# Altium PCB SoundActiveLight.PcbDoc
Units mm, origin at the board's own origin, x right, y up, seen from the top; angles counter-clockwise.
Board outline 60 x 25 mm, 2 copper layers (Top Layer, Bottom Layer); 21 components, 17 nets, 65 pads, 15 vias.
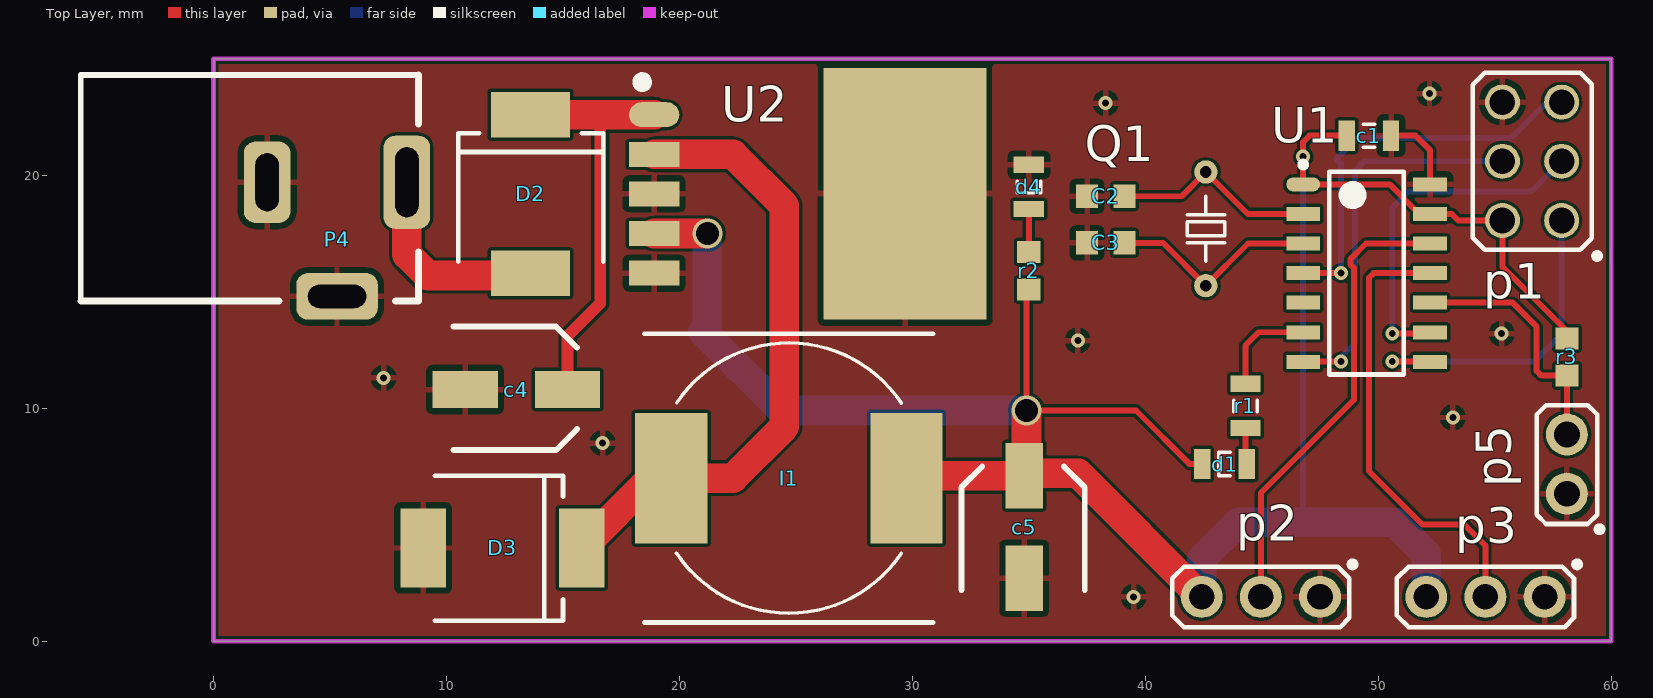
[diagram p0: Top Layer view]
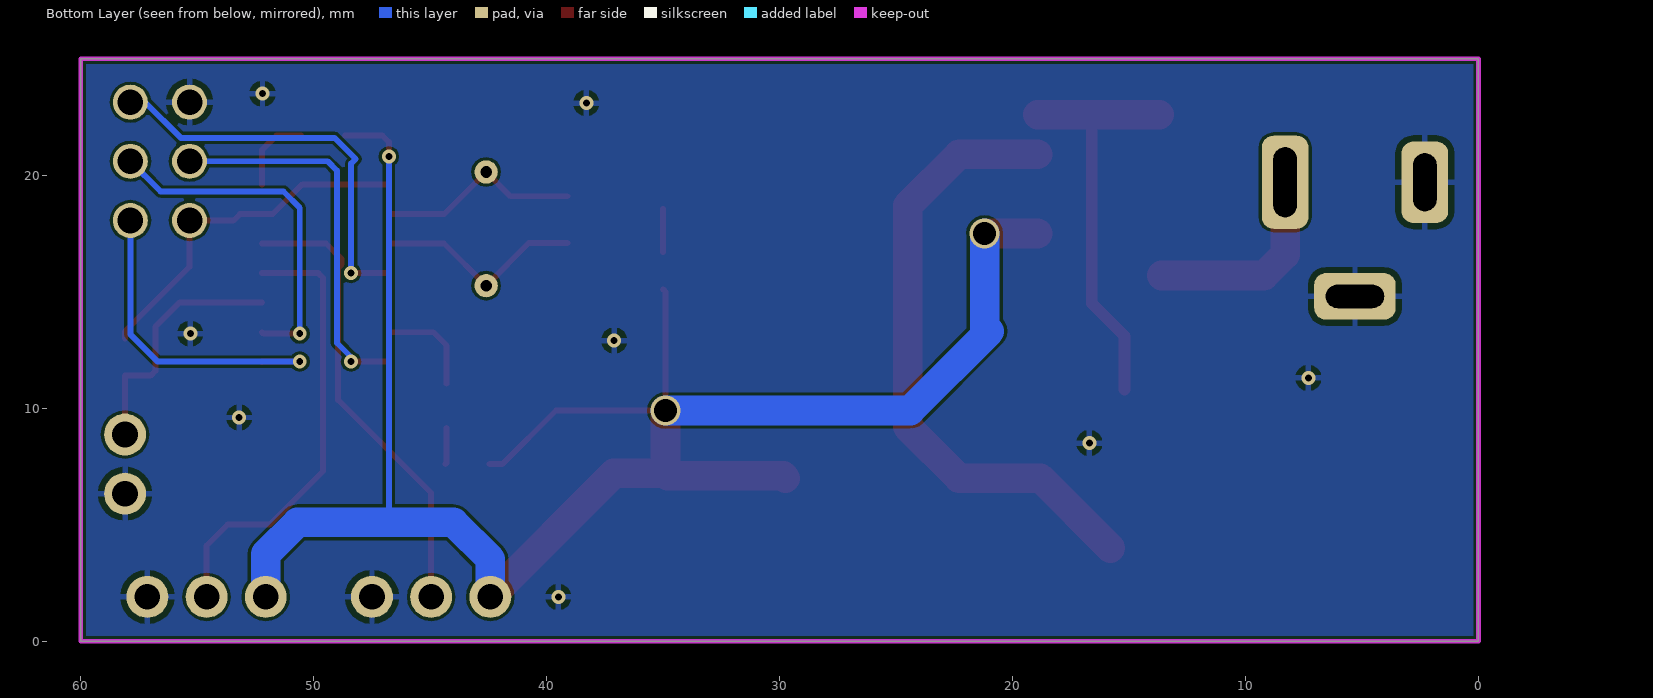
[diagram p1: Bottom Layer view, seen from below]
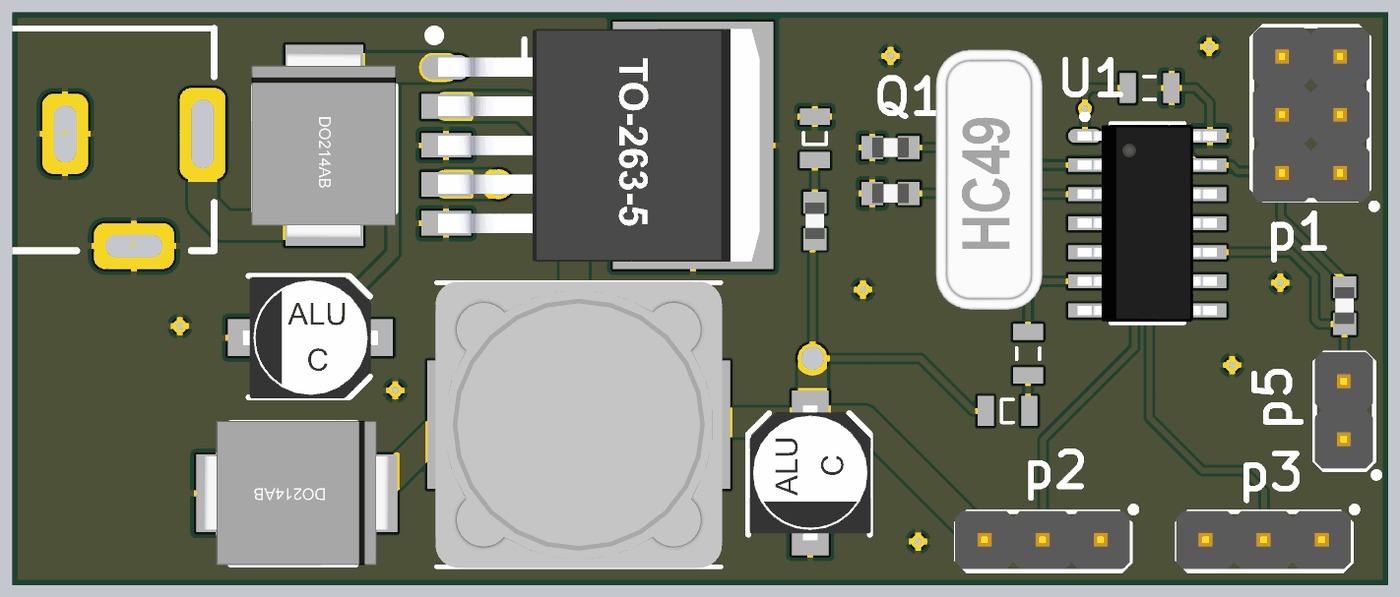
[diagram p2: 3D render of the assembled board from above, using the file's embedded part models]

## Layer stack, top to bottom
Top Solder: solder mask 0.0102, Solder Resist, Dk 3.5
Top Layer: signal copper 0.0356
Dielectric 1: dielectric 0.32, FR-4, Dk 4.8
Bottom Layer: signal copper 0.0356
Bottom Solder: solder mask 0.0102, Solder Resist, Dk 3.5

## Board outline
0,0 60,0 60,25 0,25

## Design rules (kind name [scope] priority, off if disabled: settings)
Clearance [All] p1: gap=0.127 ignorepadtopadclearanceinfootprint=FALSE
HoleSize [All] p1: absolutevalues=TRUE maxlimit=2 minlimit=0.3 maxpercent=80.000 minpercent=20.000
HoleToHoleClearance [All] p1: gap=0.305 allowstackedmicrovias=TRUE
MinimumAnnularRing [All] p1: minimumring=0.15
MinimumSolderMaskSliver [All] p1: minsoldermaskwidth=0.32
PolygonConnect [All] p1: connectstyle=Relief reliefconductorwidth=0.254 reliefentries=4 polygonreliefangle="90 Angle" airgapwidth=0.254
RoutingVias [All] p1: holewidth=0.5 width=0.8 viastyle="Through Hole" minholewidth=0.3 minwidth=0.6 maxholewidth=1 maxwidth=1.3
SolderMaskExpansion [All] p1: expansion=0.102
Width [All] p1: maxlimit=1.27 minlimit=0.127 preferedwidth=0.254
27 further rules are at their usual default settings.

## Classes and differential pairs
component class µController: c1 C2 C3 d1 p1 p2 p3 p5 Q1 r1 r3 U1
component class PowerSupply: c4 c5 D2 D3 d4 I1 P4 r2 U2

## Components (designator, comment, footprint, x,y, rotation, side; value= is the part's Value field where it differs from the comment)
c1 "100n" 0805 49.6,21.7 r0 top
C2 "18pF" 0603 38.3,19.1 r0 top
C3 "18pF" 0603 38.3,17.1 r0 top
c4 "680µF" Elco-C 13,10.8 r0 top
c5 "220µF" Elco-C 34.8,4.9 r90 top
d1 "Red LED" "0805 - diode" 43.4,7.6 r0 top
D2 "ES3D" "DO-214AB (SMC)" 13.6,19.2 r270 top
D3 "ES3D" "DO-214AB (SMC)" 12.4,4 r180 top
d4 "Red LED" "0805 - diode" 35,19.5 r90 top
I1 "33µH" DR125 24.7,7 r0 top
p1 "2x3 Header" 2x3-HeaderPin 56.6,20.6 r270 top
p2 "3 Pin Header" 1X3-HEADERPIN 44.96,1.9 r0 top
p3 "3 Pin Header" 1X3-HEADERPIN 54.6,1.9 r0 top
P4 "Power Jack" "Power Jack" 5.3,19.7 r0 top
p5 "2 Pin Header" 1X2-HEADERPIN 58.1,7.6 r270 top
Q1 "16MHz" "CRYSTAL 488P" 42.6,17.7 r90 top
r1 "220R" 0805 44.3,10.1 r90 top
r2 "220" 0603 35,15.9 r270 top
r3 "10k" 0603 58.1,12.2 r90 top
U1 "Tiny84A" SOIC14N 49.5,15.8 r0 top
U2 "LM2596" TO-263-5 24.3,19.2 r180 top

## Footprints (in the part's own frame and the unit in brackets; to place one, negate y for a bottom-side part, rotate by r counter-clockwise, add the part's x,y. Pads: shape width x height; smd on the part's side, far side on the other; paste and mask are expansions set on the pad)
1X2-HEADERPIN [mm] "1x2 Header Pin"
  round 1.8 hole 1.1: 1(1.27,0) 2(-1.27,0)
  silkscreen extent -2.53,-1.3 2.92,1.52, body extent -2.57,-1.3 2.51,1.24, height 5.94
1X3-HEADERPIN [mm] "1x3 Header Pin"
  round 1.8 hole 1.1: 1(2.54,0) 2(0,0) 3(-2.54,0)
  silkscreen extent -3.8,-1.3 4.06,1.52, body extent -3.84,-1.2 3.78,1.34, height 5.94
2x3-HeaderPin [mm] "2x3 Header Pin"
  round 1.5 hole 1.1: 1(2.54,1.27) 2(2.54,-1.27) 3(0,1.27) 4(0,-1.27) 5(-2.54,1.27) 6(-2.54,-1.27)
  silkscreen extent -3.8,-2.54 4.19,2.92, body extent -3.74,-2.5 3.88,2.58, height 5.94
0603 [mm] "Generic package"
  rect 0.95x1 smd: 1(-0.8,0) 2(0.8,0)
  body extent -0.8,-0.43 0.8,0.43, height 0.83
0805 [mm] "Generic Package"
  rect 0.7x1.3 smd: 1(-0.95,0) 2(0.95,0)
  silkscreen extent -0.25,-0.5 0.25,0.5, body extent -1,-0.63 1,0.63, height 0.43
"0805 - diode" [mm] "Generic Package with marking"
  rect 0.7x1.3 smd: 1(-0.95,0) 2(0.95,0)
  silkscreen extent -0.25,-0.5 0.25,0.5, body extent -1,-0.63 1,0.63, height 0.43
"CRYSTAL 488P" [mm] "Crystal Pitch 4.88mm - 4.65mm x 11.35mm x 3.6mm"
  round 1 hole 0.5: 1(-2.44,0) 2(2.44,0)
  silkscreen extent -1.4,-0.8 1.4,0.8, body extent -5.67,-2.32 5.68,2.33, height 3.1
"DO-214AB (SMC)" [mm]
  rect 1.96x3.39 smd: 1(-3.405,0) 2(3.405,0)
  silkscreen extent -2.6,-3.1 2.9,3.13, body extent -4.05,-3.17 4.08,3.13, height 1.27
DR125 [mm] "Large Inductor package"
  rect 3.1x5.6 smd: 1(-5.05,0) 2(5.05,0)
  silkscreen extent -6.2,-6.2 6.2,6.2, body extent -6.25,-6.25 6.25,6.25, height 7.5
Elco-C [mm] "SMD Electrolytic Capacitor-Size B-Pitch 1mm-5.3mm x 5.4mm"
  rect 2.8x1.6 smd: 1(-2.2,0) 2(2.2,0)
  silkscreen extent -2.7,-2.6 2.6,2.7, body extent -2.95,-2.65 2.95,2.65, height 5.41
"Power Jack" [mm] "6mm Jack plug"
  rrect50% 2x4 hole 1 slot 3 at 90 deg: 1(3,0)
  rrect50% 2x3.5 hole 1 slot 2.5 at 90 deg: 2(-3,0)
  rrect50% 3.5x2 hole 1 slot 2.5 at 0 deg: 2(0,-4.9)
  silkscreen extent -11,-5.1 3.5,4.6, body extent -11.05,-5.15 3.45,4.65, height 11
SOIC14N [mm] "SOIC14 - 127Pitch"
  oval 1.45x0.6 smd: 1(-2.725,3.81)
  rect 1.45x0.6 smd: 2(-2.725,2.54) 3(-2.725,1.27) 4(-2.725,0) 5(-2.725,-1.27) 6(-2.725,-2.54) 7(-2.725,-3.81) 8(2.725,-3.81) 9(2.725,-2.54) 10(2.725,-1.27) 11(2.725,0) 12(2.725,1.27) 13(2.725,2.54) 14(2.725,3.81)
  silkscreen extent -2.85,-4.35 1.6,4.78, body extent -3.04,-4.3 3.04,4.3, height 1.65
TO-263-5 [mm] "KTT Package TO-263"
  oval 2.16x1.07 smd: 1(5.385,-3.4)
  rect 2.16x1.07 smd: 2(5.385,-1.7) 3(5.385,0) 4(5.385,1.7) 5(5.385,3.4)
  rect 6.99x10.8 smd: 6(-5.385,0)
  silkscreen extent 5.6,-5.1 6.2,-4.5, body extent -8.29,-5.08 5.73,5.08, height 4.56

## Part data
c1: library part "0805 Capacitor", "...F"
C2 C3: library part "0603 Capacitor", "...F"
c4 c5: library part "Elco G"
d1 d4: "Red diffused LED"
D2 D3: "ES3D diode"
I1: library part Inductor, "Inductor with Ferrite core"
p1 p2 p3: "Header Pin"
Q1: library part Crystal, "...MHz"
r1: library part "0805 Resistor", "...R"
r2 r3: library part "0603 Resistor", "...R"
U1: library part ATTiny84A, "ATTiny84A"
U2: "LM2596 Switching Voltage Regulator"

## Via types
v1: diameter 0.6, hole 0.3, Top Layer to Bottom Layer, 13 vias
v2: diameter 1.3, hole 1, Top Layer to Bottom Layer, 2 vias

## Nets (pads, with @x,y where several pads share a name; then routed paths per layer and width w, separated by ;. In a path a pad name is that pad's centre, name@x,y a point inside that pad or via, vN(x,y) a via of type N, cw(c..) or ccw(c..) an arc to the next point about the centre after c; other vN are vias at no path point)
Button: p5.2 r3.1 U1.10 | length 10.8
  Top Layer w0.254: U1.10 55.77,14.53 56.8,13.5 56.8,11.6 57,11.4 r3.1 p5.2
GND: c1.2 C2.1 C3.1 c4.1 c5.1 D3.2 d4.2 p1.6 p2.1 p3.1 P4.2 p5.1 U1.14 U2.3 U2.5 U2.6 | length 3.4
  Top Layer w0.254: c1.2 51.6,21.7 52.225,21.075 U1.14
  other v1: 39.5,1.9 16.7,8.5 53.2,9.6 7.3,11.3 37.1,12.9 55.3,13.2 38.3,23.1 52.2,23.5
LEDs: p3.2 U1.11 | length 19.5
  Top Layer w0.254: U1.11 49.8,15.8 49.6,15.6 49.6,7.3 51.9,5 53.7,5 54.6,4.1 p3.2
Mic: p2.2 U1.12 | length 19.9
  Top Layer w0.254: p2.2 44.96,6.36 48.954,10.354 48.954,16.029 48.8,16.183 48.8,16.4 49.47,17.07 U1.12
MISO: p1.1 U1.8 | length 14.3
  Top Layer w0.254: v1(50.6,12) 52.215,12 U1.8
  Bottom Layer w0.254: v1(50.6,12) 56.7,12 57.87,13.17 p1.1
MOSI: p1.4 U1.7 | length 16.6
  Top Layer w0.254: U1.7 46.785,12 v1(48.4,12)
  Bottom Layer w0.254: v1(48.4,12) 48.4,12.2 49,12.8 49,20.2 49.4,20.6 p1.4
NetC2_2: C2.2 Q1.2 U1.2 | length 8.9
  Top Layer w0.254: C2.2 41.56,19.1 Q1.2 44.4,18.34 U1.2
NetC3_2: C3.2 Q1.1 U1.3 | length 9.2
  Top Layer w0.254: C3.2 40.76,17.1 Q1.1 44.41,17.07 U1.3
Netc4_2: c4.2 D2.1 U2.1 | length 17.9
  Top Layer w0.508: D2.1@13.6,22.505 D2.1@13.695,22.6 ; c4.2 15.2,13.1 16.6,14.5 16.6,22.305 16.305,22.6
  Top Layer w1.27: D2.1@13.695,22.6 16.305,22.6 U2.1
Netd1_2: d1.2 r1.1 | length 1.6
  Top Layer w0.254: r1.1 44.3,7.65 d1.2
NetD2_2: D2.2 P4.1 | length 8.8
  Top Layer w1.27: P4.1 8.3,16.6 9.205,15.695 D2.2@13.6,15.695
NetD3_1: D3.1 I1.1 U2.2 | length 26.8
  Top Layer w1.27: D3.1 18.805,7 I1.1 22.3,7 24.5,9.2 24.5,18.7 22.3,20.9 U2.2
Netd4_1: d4.1 r2.1 | length 1.8
  Top Layer w0.254: r2.1 d4.1
Netr1_2: r1.2 U1.6 | length 4.4
  Top Layer w0.254: r1.2 44.3,12.7 44.86,13.26 U1.6
RESET: p1.5 U1.4 | length 17.3
  Top Layer w0.254: U1.4 v1(48.4,15.8)
  Bottom Layer w0.254: v1(48.4,15.8) 48.4,20.5 48.2,20.7 49.1,21.6 54.91,21.6 54.914,21.604 55.704,21.604 57.24,23.14 p1.5
SCK: p1.3 U1.9 | length 15.1
  Top Layer w0.254: v1(50.6,13.2) 52.165,13.2 U1.9
  Bottom Layer w0.254: v1(50.6,13.2) 50.6,18.6 51.3,19.3 56.57,19.3 p1.3
VCC: c1.1 c5.2 d1.1 I1.2 p1.2 p2.3 p3.3 r2.2 r3.2 U1.1 U1.13 U2.4 | length 102.8
  Top Layer w0.254: r2.2 34.9,15 v2(34.9,9.9) 39.6,9.9 41.9,7.6 d1.1 ; c1.1 47.05,21.7 46.775,21.425 v1(46.775,20.8) U1.1 50.49,19.61 51.76,18.34 U1.13 53.16,18.34 53.44,18.06 p1.2 55.33,16.07 58.1,13.3 r3.2
  Top Layer w1.27: U2.4 v2(21.2,17.5) ; I1.2 29.85,7.1 c5.2 c5.2@34.7,7.2 ; v2(34.9,9.9) 34.9,7.4 c5.2@34.7,7.2 ; p2.3 37.12,7.2 c5.2@34.7,7.2
  Bottom Layer w0.254: v1(46.775,20.8) 46.775,5.125 46.8,5.1
  Bottom Layer w1.27: v2(21.2,17.5) 21.2,13.5 21,13.3 24.4,9.9 v2(34.9,9.9) ; p2.3 42.42,3.52 44,5.1 46.8,5.1 50.7,5.1 52.06,3.74 p3.3
pads on no net: U1.5

## Polygon pours and split planes (outlines as drawn)
GND on Top Layer "Top Layer-No Net" (solid, pour order 0): 0,0 0,25 60,25 60,0
GND on Bottom Layer "Top Layer-No Net" (solid, pour order 2): 0,0 0,25 60,25 60,0

## Keep-outs
Keep-Out Layer:
  the board outline again, w0.2